# Altium PCB CANcard_pcb.PcbDoc
Units mil, origin at the board's own origin, x right, y up, seen from the top; angles counter-clockwise.
Board outline 1968.5 x 2044.61 mil, 2 copper layers (Top Layer, Bottom Layer); 34 components, 47 nets, 190 pads, 10 vias.
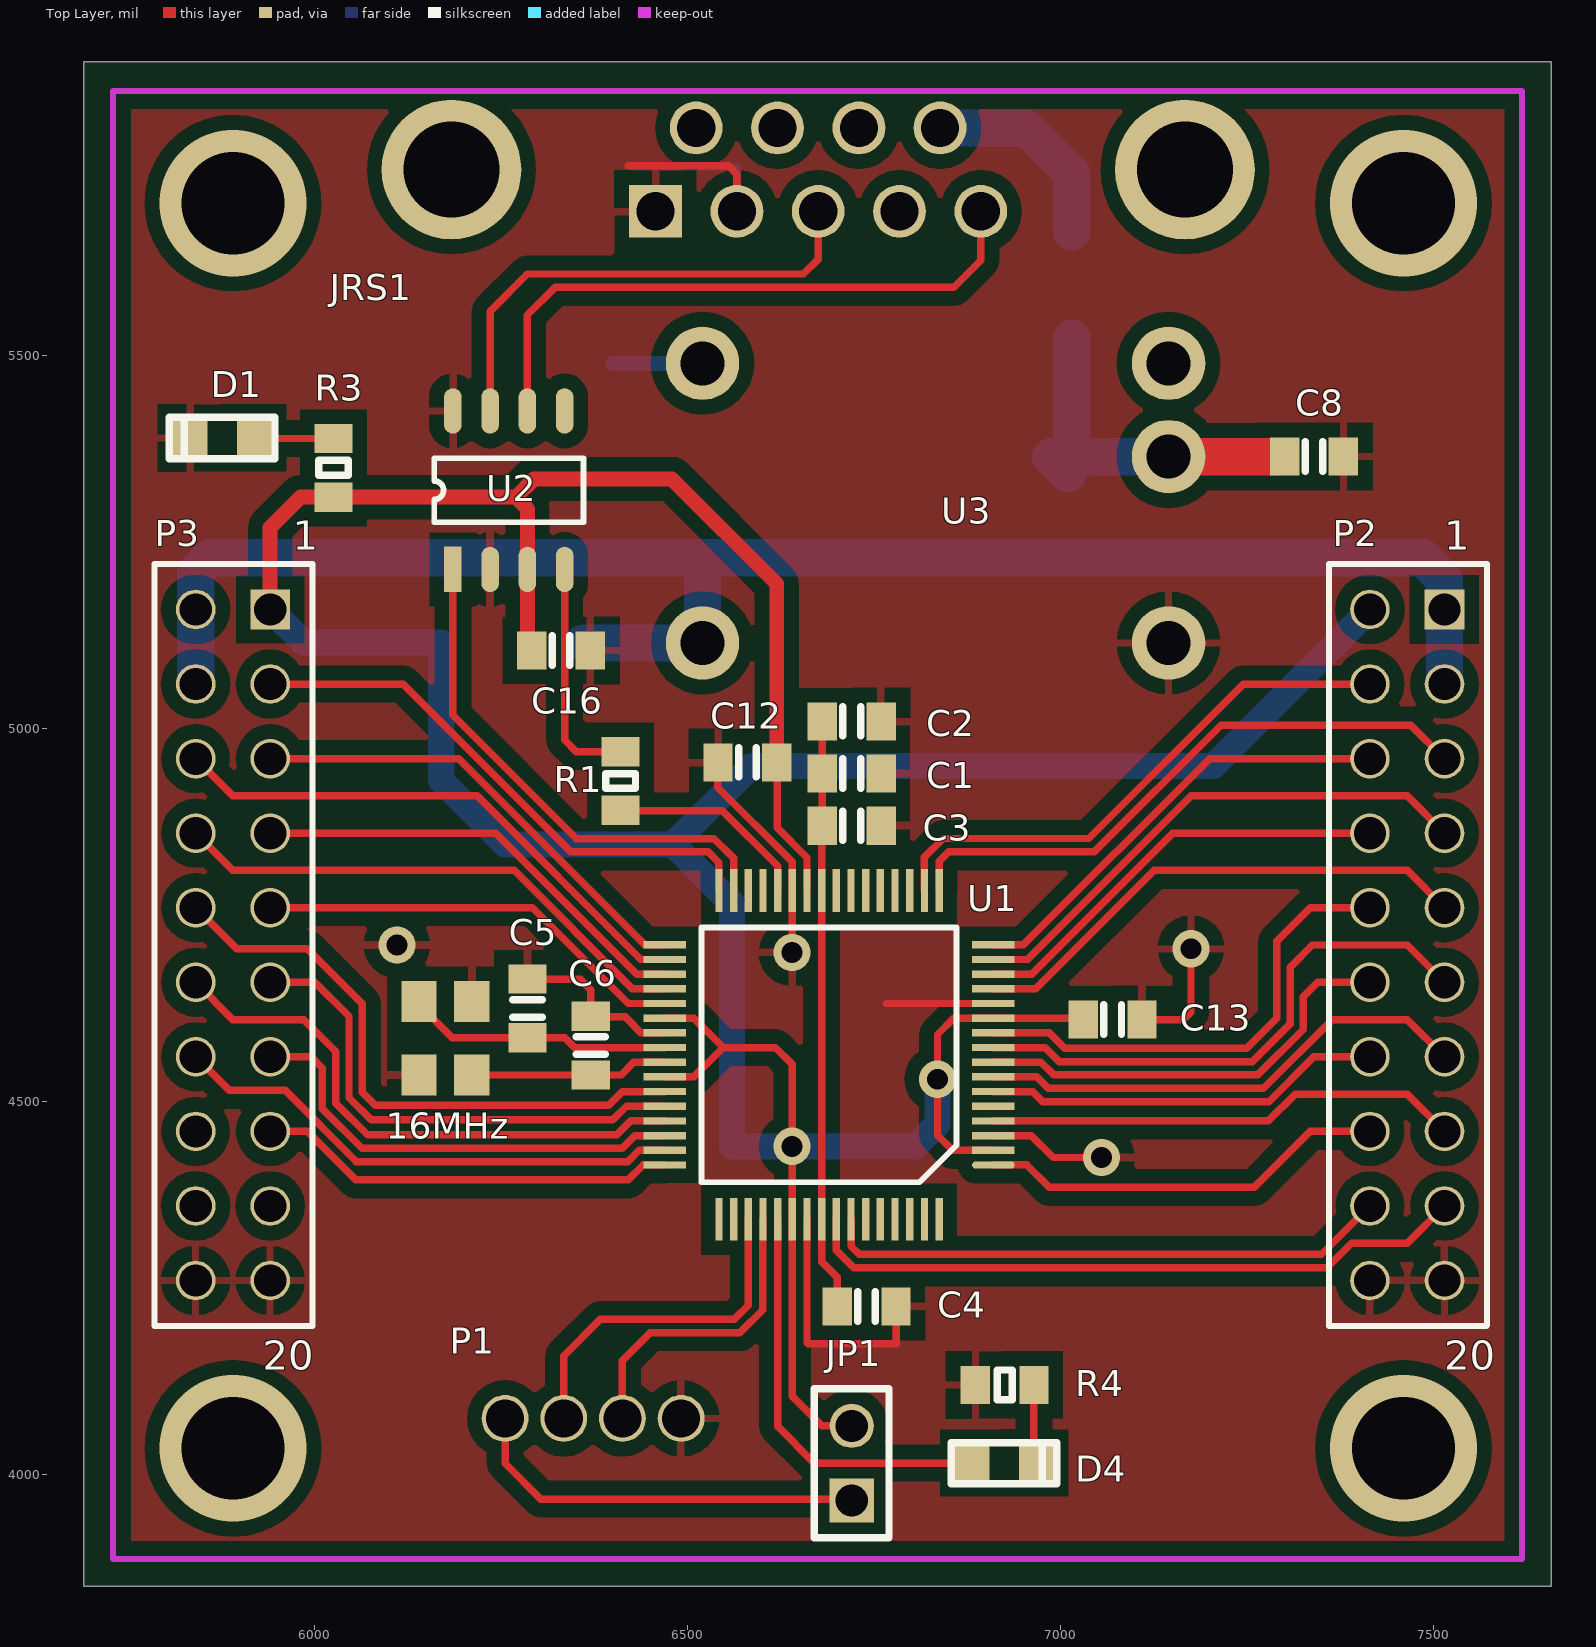
[diagram p0: Top Layer view]
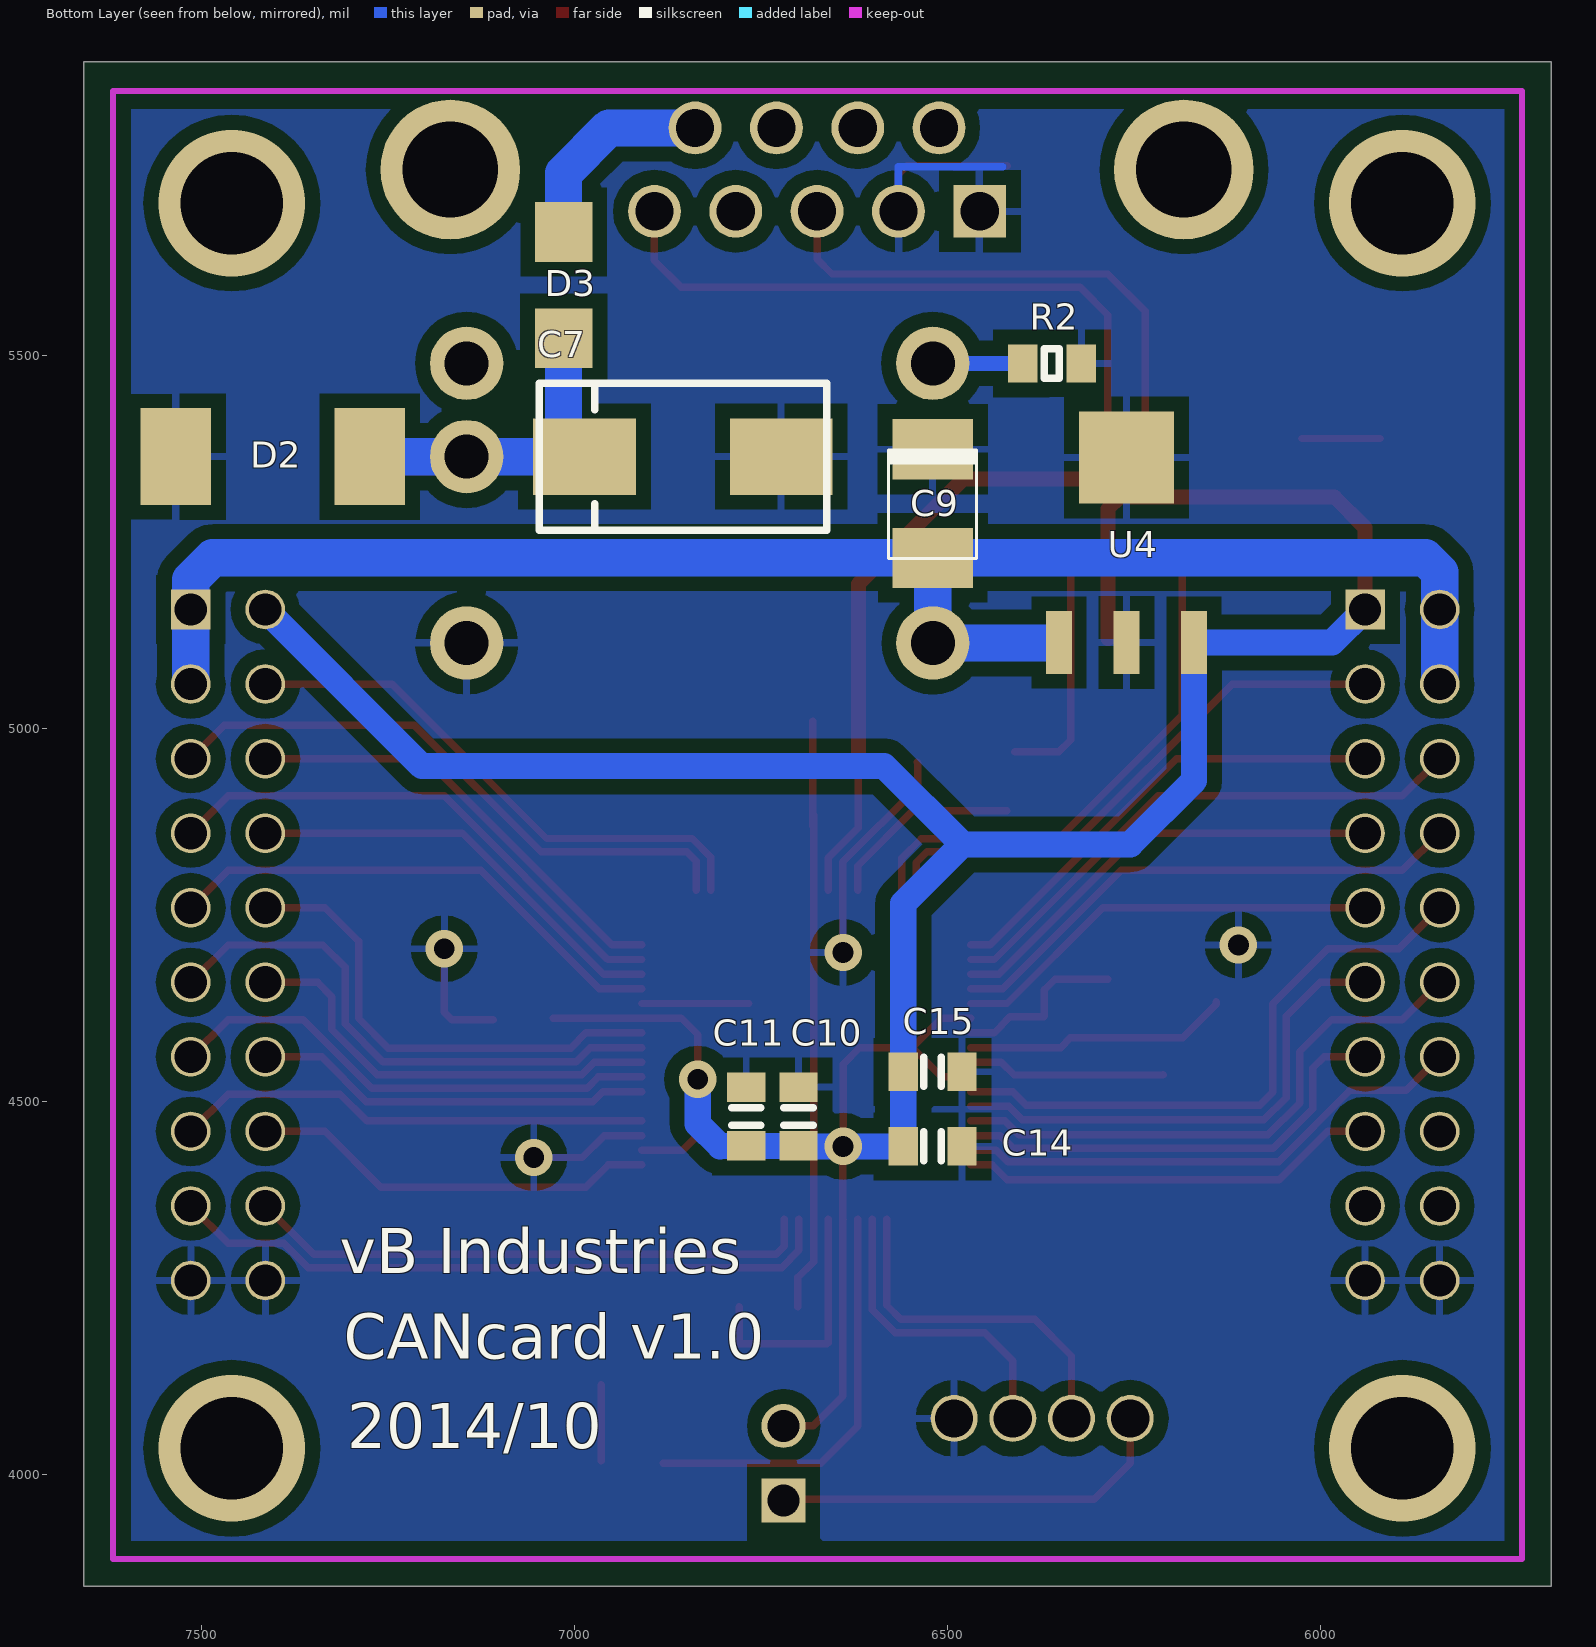
[diagram p1: Bottom Layer view, seen from below]
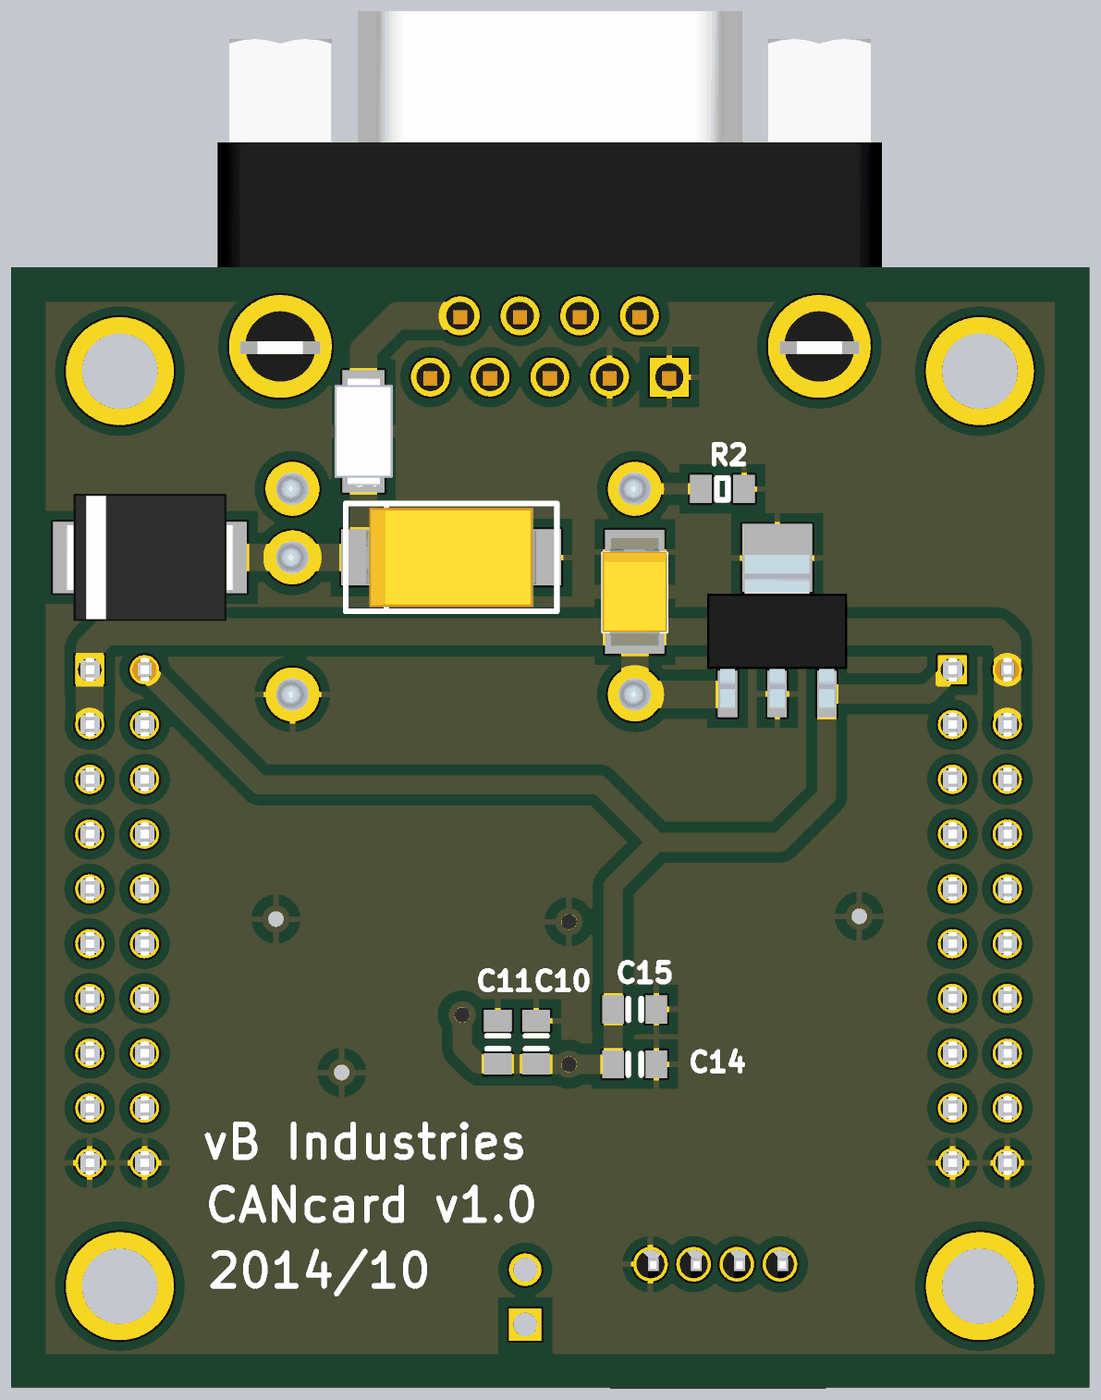
[diagram p2: 3D render of the assembled board from below, using the file's embedded part models]

## Layer stack, top to bottom
Top Layer: signal copper 1.4
Dielectric: dielectric 12.6, FR-4, Dk 4.8
Bottom Layer: signal copper 1.4

## Board outline
5690,3850 7658.5,3850 7658.5,5894.61 5690,5894.61

## Design rules (kind name [scope] priority, off if disabled: settings)
Clearance Clearance_poly [Inpoly] p1: gap=19.68
Clearance [All] p2: gap=7.87
HoleSize [All] p1: absolutevalues=TRUE maxlimit=393.7 minlimit=27.56 maxpercent=80.000 minpercent=20.000
MinimumSolderMaskSliver [All] p1: minsoldermaskwidth=0
PolygonConnect [All] p1: connectstyle=Relief reliefconductorwidth=10 reliefentries=4 polygonreliefangle="90 Angle"
RoutingVias [All] p1: holewidth=27.56 width=43.31 viastyle="Through Hole" minholewidth=27.56 minwidth=43.31 maxholewidth=314.96 maxwidth=393.7
SilkToSilkClearance [All] p1 off: silktosilkclearance=10
SilkscreenOverComponentPads [All] p1 off: minsilkscreentomaskgap=10
SolderMaskExpansion [All] p1: expansion=4
Width [All] p1: maxlimit=393.7 minlimit=9.84 preferedwidth=9.84
24 further rules are at their usual default settings.

## Components (designator, comment, footprint, x,y, rotation, side; value= is the part's Value field where it differs from the comment)
16MHz "XTAL" XTAL 6175,4585 r270 top
C1 "2.2uF" FP_0805_CAP 6720,4940 r180 top
C2 "1uF" FP_0805_CAP 6720,5010 r180 top
C3 "100nF" FP_0805_CAP 6720,4870 r180 top
C4 "100nF" FP_0805_CAP 6740,4225 r180 top
C5 "10pF" FP_0805_CAP 6285,4625 r270 top
C6 "10pF" FP_0805_CAP 6370,4575 r270 top
C7 "100uF" 7343_D 6855,5365 r180 bottom
C8 "10uF" FP_0805_CAP 7340,5365 r180 top
C9 "100uF" 3528_B 6520,5245 r270 bottom
C10 "2.2uF" FP_0805_CAP 6700,4480 r270 bottom
C11 "1uF" FP_0805_CAP 6770,4480 r270 bottom
C12 "100nF" FP_0805_CAP 6580,4955 r0 top
C13 "100nF" FP_0805_CAP 7070,4610 r180 top
C14 "100nF" FP_0805_CAP 6520,4440 r0 bottom
C15 "100nF" FP_0805_CAP 6520,4540 r0 bottom
C16 "100nF" FP_0805_CAP 6330,5105 r180 top
D1 "LED" FP_0805_LED_RED 5915,5390 r180 top
D2 "ZENER" DO-214AB 7405,5365 r180 bottom
D3 "SCHOTTKY" DO-214AC 7015,5595 r90 bottom
D4 "LED" FP_0805_LED_GREEN 6885,4015 r0 top
JP1 "JUMPER" JUMPER 6720,3965 r0 top
JRS1 "Conn9 Padre" "RS232 MADRE" 6675,5750 r0 top
P1 "SWD interface" DF3A-4P-2DS 6255,4075 r0 top
P2 "Extension-header" FH20p254pitch_thru-hole 7465,4710 r270 top
P3 "Extension-header" FH20p254pitch_thru-hole 5890,4710 r270 top
R1 "1K" FP_0805_RES 6410,4930 r90 top
R2 "21K" FP_0805_RES 6360,5490 r180 bottom
R3 "68R" FP_0805_RES 6025,5350 r270 top
R4 "62R" FP_0805_RES 6925,4120 r0 top
U1 "TM4C123FH6PM" LQFP64 6910,4415 r180 top
U2 "CAN transciever" SOP8 6260,5320 r90 top
U3 "PTN78000W" PTN78000WAH 7145,5115 r180 top
U4 "UA78M33" SOT-223 6260,5230 r180 bottom

## Footprints (in the part's own frame and the unit in brackets; to place one, negate y for a bottom-side part, rotate by r counter-clockwise, add the part's x,y. Pads: shape width x height; smd on the part's side, far side on the other; paste and mask are expansions set on the pad)
3528_B [mm] "3528 TANTaL SMD \"B\"-Package"
  rect 2.05x2.75 smd: 1(0.4,0) 2(-3.3,0)
  silkscreen extent -3.27,-1.5 0.43,1.5, body extent -3.94,-1.5 1.06,1.5, height 2.62
7343_D [mm]
  rect 3.5x2.6 smd: 1(-3.35,0) 2(3.35,0)
  silkscreen extent -4.9,-2.5 4.9,2.5, body extent -4.49,-2.31 4.5,2.31, height 3.1
DF3A-4P-2DS [mm] "Based on Hirose DF3A-4P-2DS model."
  round 1.6 hole 1.3: 1(0,0) 2(2,0) 3(4,0) 4(6,0)
  body extent -2.13,-5.76 7.87,1.44, height 5
DO-214AB [mm]
  rect 2.4x3.3 smd: 1(-3.3,0) 2(3.3,0)
  body extent -3.9,-2.95 3.9,2.95, height 2.4
DO-214AC [mm] "DO-214AC(SMA)"
  rect 2.04x1.96 smd: 1(-1.81,0) 2(1.81,0)
  body extent -2.5,-1.35 2.5,1.35, height 2.15
FH20p254pitch_thru-hole [mm] "Connector; Header; 10x2 Position, 2.54mm pitch, thru-hole"
  rect 1.35x1.35 hole 1.1: 1(-11.43,1.27)
  round 1.35 hole 1.1: 2(-11.43,-1.27) 3(-8.89,1.27) 4(-8.89,-1.27) 5(-6.35,1.27) 6(-6.35,-1.27) 7(-3.81,1.27) 8(-3.81,-1.27) 9(-1.27,1.27) 10(-1.27,-1.27) 11(1.27,1.27) 12(1.27,-1.27) 13(3.81,1.27) 14(3.81,-1.27) 15(6.35,1.27) 16(6.35,-1.27) 17(8.89,1.27) 18(8.89,-1.27) 19(11.43,1.27) 20(11.43,-1.27)
  silkscreen extent -12.98,-2.67 12.98,2.72, body extent -12.82,-2.51 12.83,2.49, height 8.5
FP_0805_CAP [mm] "0805 capacitor YAGEO 0.85mm height"
  rect 1x1.3 smd: 1(-1,0) 2(1,0)
  silkscreen extent -0.3,-0.5 0.3,0.5, body extent -1,-0.64 1.03,0.64, height 0.85
FP_0805_LED_GREEN [mm] "0805 méretû zöld LED"
  rect 1.2x1.3 smd: A(-0.1,0) K(2.1,0)
  silkscreen extent -0.8,-0.7 2.8,0.7, body extent 0.01,-0.63 2.03,0.62, height 1.1
FP_0805_LED_RED [mm] "0805 méretû piros LED"
  rect 1.2x1.3 smd: A(-0.1,0) K(2.1,0)
  silkscreen extent -0.8,-0.7 2.8,0.7, body extent 0.01,-0.63 2.03,0.62, height 1.1
FP_0805_RES [mm]
  rect 1x1.3 smd: 1(-1,0) 2(1,0)
  silkscreen extent -0.25,-0.51 0.25,0.51, body extent -1,-0.64 1.03,0.64, height 0.5
JUMPER [mm] "2×1 tüskesor"
  rect 1.5x1.5 hole 1.1: 1(0,0)
  round 1.5 hole 1.1: 2(0,2.54)
  silkscreen extent -1.27,-1.27 1.27,3.81, body extent -1.27,-1.27 1.27,3.81, height 8.54
LQFP64 [mm] "TM4C123FH6PM package"
  oval 1.45x0.25 smd: 1(0,0)
  rect 1.45x0.25 smd: 2(0,-0.5) 3(0,-1) 4(0,-1.5) 5(0,-2) 6(0,-2.5) 7(0,-3) 8(0,-3.5) 9(0,-4) 10(0,-4.5) 11(0,-5) 12(0,-5.5) 13(0,-6) 14(0,-6.5) 15(0,-7) 16(0,-7.5) 33(11.2,-7.5) 34(11.2,-7) 35(11.2,-6.5) 36(11.2,-6) 37(11.2,-5.5) 38(11.2,-5) 39(11.2,-4.5) 40(11.2,-4) 41(11.2,-3.5) 42(11.2,-3) 43(11.2,-2.5) 44(11.2,-2) 45(11.2,-1.5) 46(11.2,-1) 47(11.2,-0.5) 48(11.2,0)
  rect 0.25x1.45 smd: 17(1.85,-9.35) 18(2.35,-9.35) 19(2.85,-9.35) 20(3.35,-9.35) 21(3.85,-9.35) 22(4.35,-9.35) 23(4.85,-9.35) 24(5.35,-9.35) 25(5.85,-9.35) 26(6.35,-9.35) 27(6.85,-9.35) 28(7.35,-9.35) 29(7.85,-9.35) 30(8.35,-9.35) 31(8.85,-9.35) 32(9.35,-9.35) 49(9.35,1.85) 50(8.85,1.85) 51(8.35,1.85) 52(7.85,1.85) 53(7.35,1.85) 54(6.85,1.85) 55(6.35,1.85) 56(5.85,1.85) 57(5.35,1.85) 58(4.85,1.85) 59(4.35,1.85) 60(3.85,1.85) 61(3.35,1.85) 62(2.85,1.85) 63(2.35,1.85) 64(1.85,1.85)
  silkscreen extent 1.26,-8.09 9.94,0.59, body extent -0.4,-9.75 11.6,2.25, height 1.5
PTN78000WAH [mm]
  round 2.5 hole 1.5: 1(0,0) 2(0,-6.35) 3(0,-9.53) 4(15.88,-9.53) 5(15.88,0)
  body extent -1.59,-11.05 17.33,1.52, height 8.23
"RS232 MADRE" [mm]
  rect 1.8x1.8 hole 1.3: 1(-5.54,-1.42)
  round 1.8 hole 1.3: 2(-2.77,-1.42) 3(0,-1.42) 4(2.77,-1.42) 5(5.54,-1.42) 6(-4.155,1.42) 7(-1.385,1.42) 8(1.385,1.42) 9(4.155,1.42)
  round 4.76 hole 3.26: 10(-12.495,0) 11(12.495,0)
  body extent -15.4,-3.05 15.4,15.55, height 12.57
SOP8 [mm]
  rect 1.55x0.6 smd: 1(-2.7,1.905)
  oval 1.55x0.6 smd: 2(-2.7,0.635) 3(-2.7,-0.635) 4(-2.7,-1.905) 5(2.7,-1.905) 6(2.7,-0.635) 7(2.7,0.635) 8(2.7,1.905)
  silkscreen extent -1.09,-2.54 1.09,2.54, body extent -3.02,-2.51 3.02,2.51, height 1.6
SOT-223 [mm]
  rect 0.9x2.15 smd: 1(-2.3,-2.9) 2(0,-2.9) 3(2.3,-2.9)
  rect 3.25x3.15 smd: 4(0,3.4)
  body extent -3.25,-3.54 3.25,3.54, height 1.65
XTAL [mm] "16.000000MHz QUARZ SMD/NXK-32 (NSK) package"
  rect 1.4x1.2 smd: 1(-1.25,-0.9) 2(1.25,0.9) 3(1.25,-0.9) 4(-1.25,0.9)
  body extent -1.6,-1.25 1.6,1.25, height 0.77

## Part data
16MHz: "Crystal"
C1 C2 C3 C4 C5 C6 C8 C10 C11 C12 C13 C14 C15 C16: library part CAP, "Capacitor"
C7 C9: library part Cap-Elco, "Polarized Capacitor"
D1 D4: "Typical RED GaAs LED"
D2: "Zener Diode"
D3: "NXP - PMEG3020EJ,115 - SCHOTTKY RECT 30V 2A SOD323F"
JP1: "Jumper Wire"
JRS1: library part "RS232 Padre Connector 9", "RS232 On Board Conn Padre"
P1: library part SWDinterface, "4 pole connector for debugging and programming"
P2 P3: library part "Extension header"
R1 R2 R3 R4: library part RES, "Resistor"
U1: "Tiva ARM Cortex-M3 Microcontroller"
U2: library part SN65HVD231
U3: "1.5-A, WIDE-INPUT ADJUSTABLE SWITCHING REGULATOR"
U4: "Fixed output LDO up to 0.5A"

## Via types
v1: diameter 50, hole 28, Top Layer to Bottom Layer, 6 vias
v2: diameter 196.85, hole 137.8, Top Layer to Bottom Layer, 4 vias

## Nets (pads, with @x,y where several pads share a name; then routed paths per layer and width w, separated by ;. In a path a pad name is that pad's centre, name@x,y a point inside that pad or via, vN(x,y) a via of type N, cw(c..) or ccw(c..) an arc to the next point about the centre after c; other vN are vias at no path point)
3V3: C10.2 C11.2 C12.2 C13.2 C14.2 C15.2 C16.2 JP1.2 P2.2 P3.1 R3.2 U1.2 U1.11 U1.26 U1.38 U1.42 U1.54 U2.3 U4.3 | length 5385.4
  Top Layer w10: U1.42 6508.11,4533.11 6547.5,4572.5 ; U1.38 6508.15,4611.85 6547.5,4572.5 ; C12.2 6620,4954.37 6620,4867.15 6660,4827.15 U1.26 ; U1.54@6640,4341.85 U1.54 ; JP1.2 6680,4065 6640.32,4104.68 U1.54 ; U1.2 6855.31,4434.69 6835,4455 v1(6835,4530) 6835,4590 6856.85,4611.85 U1.11 C13.2@7028.78,4611.85 ; 6547.5,4572.5 6617.5,4572.5 6640,4550 v1(6640,4440) 6640.32,4439.68 U1.54
  Top Layer w20: P3.1 5940,5270 5980.63,5310.63 R3.2 6269.37,5310.63 ; C16.2@6285,5120.78 U2.3 6285,5295 6269.37,5310.63 ; C12.2 6619.37,5194.37 6478.74,5335 6293.74,5335 6269.37,5310.63
  Bottom Layer w35: P3.1 5984.17,5115.83 U4.3 6169.45,4930.55 6255,4845 6480,4845 ; 6804.37,4440.63 C11.2 C10.2 6699.37,4440 v1(6640,4440) C14.2 C15.2 6559.37,4765.63 6480,4845 ; 6805,4440 6835,4470 v1(6835,4530) ; v1@6833.11,4530.63 v1@6834.37,4529.37 ; P2.2 7205,4950 6585,4950 6480,4845
5V: C9.1 P2.1 P2.3 P3.2 P3.4 U3.5 U4.1 | length 2258.9
  Bottom Layer w50: P3.4 P3.2 5840,5210 5859.25,5229.25 C9.1 7485.75,5229.25 7515,5200 P2.1 P2.3 ; U4.1@6360,5115 U3.5 C9.1@6519.8,5229.06
GND: 16MHz.3 16MHz.4 C1.1 C2.1 C3.1 C4.1 C5.1 C6.1 C7.2 C8.1 C9.2 C10.1 C11.1 C12.1 C13.1 C14.1 C15.1 C16.1 D1.K D2.1 JRS1.1 JRS1.2 P1.4 P2.19 P2.20 P3.19 P3.20 R2.2 R4.1 U1.3 U1.12 U1.27 U1.39 U1.55 U2.2 U2.8 U3.1 U4.2 U4.4 | length 1732.8
  Top Layer w10: v1@6103.07,4703.07 v1(6110,4710) ; C5.1 6355.63,4664.37 6370,4650 C6.1 6370.71,4613.66 6416.34,4613.66 6427.64,4602.36 6427.64,4601.6 6437.07,4592.16 U1.39 ; 6420,5755 6554.97,5755 6565.94,5744.03 JRS1.2 ; C12.1 6540,4954.37 6540,4921.87 6640.32,4821.55 U1.27 v1@6640.32,4700.32 ; U1.55 6660,4176.81 6661.81,4175 6779.65,4175 C4.1@6779.65,4224.72 ; 6766.53,4631.53 U1.12 ; U1.3 6960.63,4454.37 6990,4425 v1(7055,4425) ; C13.1 7165,4610 7175,4620 v1(7175,4705)
  Bottom Layer w10: 6425.94,5754.06 6565.94,5754.06 JRS1.2
  other v1: 6640,4700
Net16MHz_1: 16MHz.1 C5.2 U1.40 | length 357.3
  Top Layer w10: 16MHz.1 6139.57,4630.43 6184.37,4585.63 C5.2 6335.26,4585.63 6348.41,4572.48 U1.40
Net16MHz_2: 16MHz.2 C6.2 U1.41 | length 265.8
  Top Layer w10: 16MHz.2 6210.59,4535.63 C6.2 6410.63,4535.63 6427.8,4552.8 U1.41
NetC7_1: C7.1 C8.2 D2.2 D3.1 U3.2 | length 566.4
  Top Layer w50: U3.2 C8.2@7290,5365
  Bottom Layer w50: C7.1 C7.1@7009.92,5341.97 ; C7.1@7015,5365 D3.1 ; C7.1@7045,5365 U3.2 D2.2
NetD1_1: D1.A R3.1 | length 105.4
  Top Layer w10: D1.A@5919.57,5389.37 R3.1
NetD4_1: D4.A U1.53 | length 558.7
  Top Layer w10: U1.53 6620.63,4064.37 6670,4015 D4.A
NetD4_2: D4.K R4.2 | length 101.7
  Top Layer w10: D4.K@6964.37,4018.31 R4.2
NetJP1_1: JP1.1 P1.1 | length 545.7
  Top Layer w10: P1.1 6255,4015 6303.13,3966.87 6718.13,3966.87 JP1.1
NetJRS1_3: JRS1.3 U2.7 | length 666.8
  Top Layer w10: U2.7 6235,5560 6285,5610 6655,5610 6675,5630 JRS1.3
NetJRS1_5: JRS1.5 U2.6 | length 833.1
  Top Layer w10: U2.6 6285,5555 6322.13,5592.13 6857.13,5592.13 6893.11,5628.11 JRS1.5
NetP1_2: P1.2 U1.51 | length 475
  Top Layer w10: P1.2 6333.74,4158.74 6382.87,4207.87 6562.6,4207.87 6581.26,4226.54 U1.51
NetP1_3: P1.3 U1.52 | length 415.5
  Top Layer w10: P1.3 6412.48,4152.48 6450,4190 6570,4190 6600.95,4220.95 U1.52
NetP2_4: P2.4 U1.18 | length 738.4
  Top Layer w10: U1.18 6817.48,4827.76 6842.6,4852.87 7037.87,4852.87 7245,5060 P2.4
NetP2_5: P2.5 U1.17 | length 811.3
  Top Layer w10: U1.17 6837.17,4822.17 6850,4835 7045.28,4835 7215.28,5005 7470,5005 P2.5
NetP2_6: P2.6 U1.16 | length 608.4
  Top Layer w10: U1.16 6950.27,4710.27 7200,4960 P2.6
NetP2_7: P2.7 U1.15 | length 714
  Top Layer w10: U1.15 6955.87,4690.59 ; 6957.68,4692.4 7175.28,4910 7465,4910 P2.7
NetP2_8: P2.8 U1.14 | length 583.3
  Top Layer w10: U1.14 6961.46,4670.9 7150.56,4860 P2.8
NetP2_9: P2.9 U1.13 | length 691.5
  Top Layer w10: U1.13 6967.05,4651.22 7125.83,4810 7465,4810 P2.9
NetP2_10: P2.10 U1.10 | length 652.2
  Top Layer w10: U1.10 6984.98,4592.16 7005.61,4571.54 7250,4571.54 7290,4611.54 7290,4715 7335,4760 P2.10
NetP2_11: P2.11 U1.9 | length 742.7
  Top Layer w10: U1.9 6979.39,4572.48 6998.21,4553.66 7257.4,4553.66 7307.87,4604.13 7307.87,4680 7337.87,4710 7465,4710 P2.11
NetP2_12: P2.12 U1.8 | length 589.3
  Top Layer w10: U1.8 6973.8,4552.8 6990.81,4535.79 7264.81,4535.79 7325.75,4596.73 7325.75,4640.75 7345,4660 P2.12
NetP2_13: P2.13 U1.7 | length 670.1
  Top Layer w10: U1.7 6968.2,4533.11 6983.4,4517.91 7272.21,4517.91 7364.3,4610 7465,4610 P2.13
NetP2_14: P2.14 U1.6 | length 535.4
  Top Layer w10: U1.6 6962.61,4513.43 6976,4500.04 7279.61,4500.04 7339.57,4560 P2.14
NetP2_15: P2.15 U1.4 | length 640.6
  Top Layer w10: U1.4 7278.91,4474.06 7314.85,4510 7465,4510 P2.15
NetP2_16: P2.16 U1.1 | length 548.5
  Top Layer w10: U1.1 6955,4415 6985,4385 7260,4385 7335,4460 P2.16
NetP2_17: P2.17 U1.57 | length 901.4
  Top Layer w10: U1.57 6699.37,4300.35 6722.6,4277.13 7357.4,4277.13 7390.28,4310 7465,4310 P2.17
NetP2_18: P2.18 U1.58 | length 763.6
  Top Layer w10: U1.58 6719.06,4305.94 6730,4295 7350,4295 P2.18
NetP3_3: P3.3 U1.32 | length 738.6
  Top Layer w10: P3.3 6118.21,5060 6343.28,4834.93 6527.58,4834.93 6541.89,4820.62 U1.32
NetP3_5: P3.5 U1.33 | length 632.5
  Top Layer w10: P3.5 6192.94,4960 6442.66,4710.27 U1.33
NetP3_6: P3.6 U1.34 | length 740.6
  Top Layer w10: P3.6 5890,4910 6217.66,4910 6437.07,4690.59 U1.34
NetP3_7: P3.7 U1.35 | length 607.4
  Top Layer w10: P3.7 6242.38,4860 6431.48,4670.9 U1.35
NetP3_8: P3.8 U1.36 | length 715.5
  Top Layer w10: P3.8 5890,4810 6267.1,4810 6425.88,4651.22 U1.36
NetP3_9: P3.9 U1.37 | length 582.3
  Top Layer w10: P3.9 6291.83,4760 6420.29,4631.53 U1.37
NetP3_10: P3.10 U1.43 | length 815.6
  Top Layer w10: P3.10 5895,4705 5990,4705 6063.62,4631.38 6063.62,4512.77 6081.03,4495.35 6394.24,4495.35 6412.31,4513.43 U1.43
NetP3_11: P3.11 U1.44 | length 676.9
  Top Layer w10: P3.11 6000,4660 6045.75,4614.25 6045.75,4505.36 6075.69,4475.42 6399.58,4475.42 6417.91,4493.74 U1.44
NetP3_12: P3.12 U1.45 | length 762.1
  Top Layer w10: P3.12 5890,4610 5985,4610 6027.87,4567.13 6027.87,4497.96 6070.56,4455.28 6404.72,4455.28 6423.5,4474.06 U1.45
NetP3_13: P3.13 U1.46 | length 618.8
  Top Layer w10: P3.13 5995,4560 6010,4545 6010,4490.56 6063.15,4437.4 6412.13,4437.4 6429.09,4454.37 U1.46
NetP3_14: P3.14 U1.47 | length 693.5
  Top Layer w10: P3.14 5885,4515 5960.28,4515 6055.75,4419.53 6419.53,4419.53 6434.69,4434.69 U1.47
NetP3_15: P3.15 U1.48 | length 564.3
  Top Layer w10: P3.15 5990,4460 6055,4395 6420.28,4395 6440.28,4415 U1.48
NetR1_1: R1.1 U1.28 | length 263.5
  Top Layer w10: R1.1@6420.63,4890 6546.59,4890 6620.63,4815.96 U1.28
NetR1_2: R1.2 U2.4 | length 310.2
  Top Layer w10: U2.4 6335,4985 6350.63,4969.37 R1.2
NetR2_1: R2.1 U3.4 | length 120.4
  Bottom Layer w20: R2.1@6399.37,5490.2 U3.4
NetU1_31: U1.31 U2.1 | length 694.5
  Top Layer w10: U2.1 6185,5018.49 6350.69,4852.81 6534.98,4852.81 6561.58,4826.21 U1.31
VBAT: D3.2 JRS1.9 | length 280.4
  Bottom Layer w50: JRS1.9 6954.09,5805.91 7015,5745 D3.2
VDDC: C1.2 C2.2 C3.2 C4.2 U1.25 U1.56 | length 808.7
  Top Layer w10: C3.2@6679.69,4885 U1.25 U1.56 6679.69,4285.31 6700.63,4264.37 C4.2 ; C3.2 C1.2 C2.2
pads on no net: JRS1.4 JRS1.6 JRS1.7 JRS1.8 JRS1.10 JRS1.11 P3.16 P3.17 P3.18 U1.5 U1.19 U1.20 U1.21 U1.22 U1.23 U1.24 U1.29 U1.30 U1.49 U1.50 U1.59 U1.60 U1.61 U1.62 U1.63 U1.64 U2.5 U3.3
copper on no net:
  other v2: 5890,4035 7460,4035 5890,5705 7460,5705

## Polygon pours and split planes (outlines as drawn)
GND on Top Layer "Top Layer-GND" (solid, remove dead copper, pour order 2): 5729.37,5855.24 7619.13,5855.24 7619.13,3886.73 5729.37,3886.73 5729.37,5855.24
GND on Bottom Layer "Bottom Layer-GND" (solid, remove dead copper, pour order 4): 5729.37,5855.24 7619.13,5855.24 7619.13,3886.73 5729.37,3886.73 5729.37,5855.24

## Keep-outs
Keep-Out Layer:
  lines w7.87: 5729.37,3886.73 5729.37,5855.24 7619.13,5855.24 7619.13,3886.73 5729.37,3886.73

## Silkscreen, mask and mechanical layers (free items; w line width, h text height)
Bottom Overlay:
  text "vB Industries" at 7315,4270 h60
  text "CANcard v1.0" at 7310,4155 h60
  text "2014/10" at 7305,4035 h60

## Text inside footprints (layer, text, board x,y; h text height)
P2: Top Overlay "20" at 7515,4140 h39.37; Top Overlay "1" at 7515,5240 h39.37
P3: Top Overlay "20" at 5930,4140 h39.37; Top Overlay "1" at 5970,5240 h39.37